# EAGLE board Pcb (EAGLE 6.6.0)
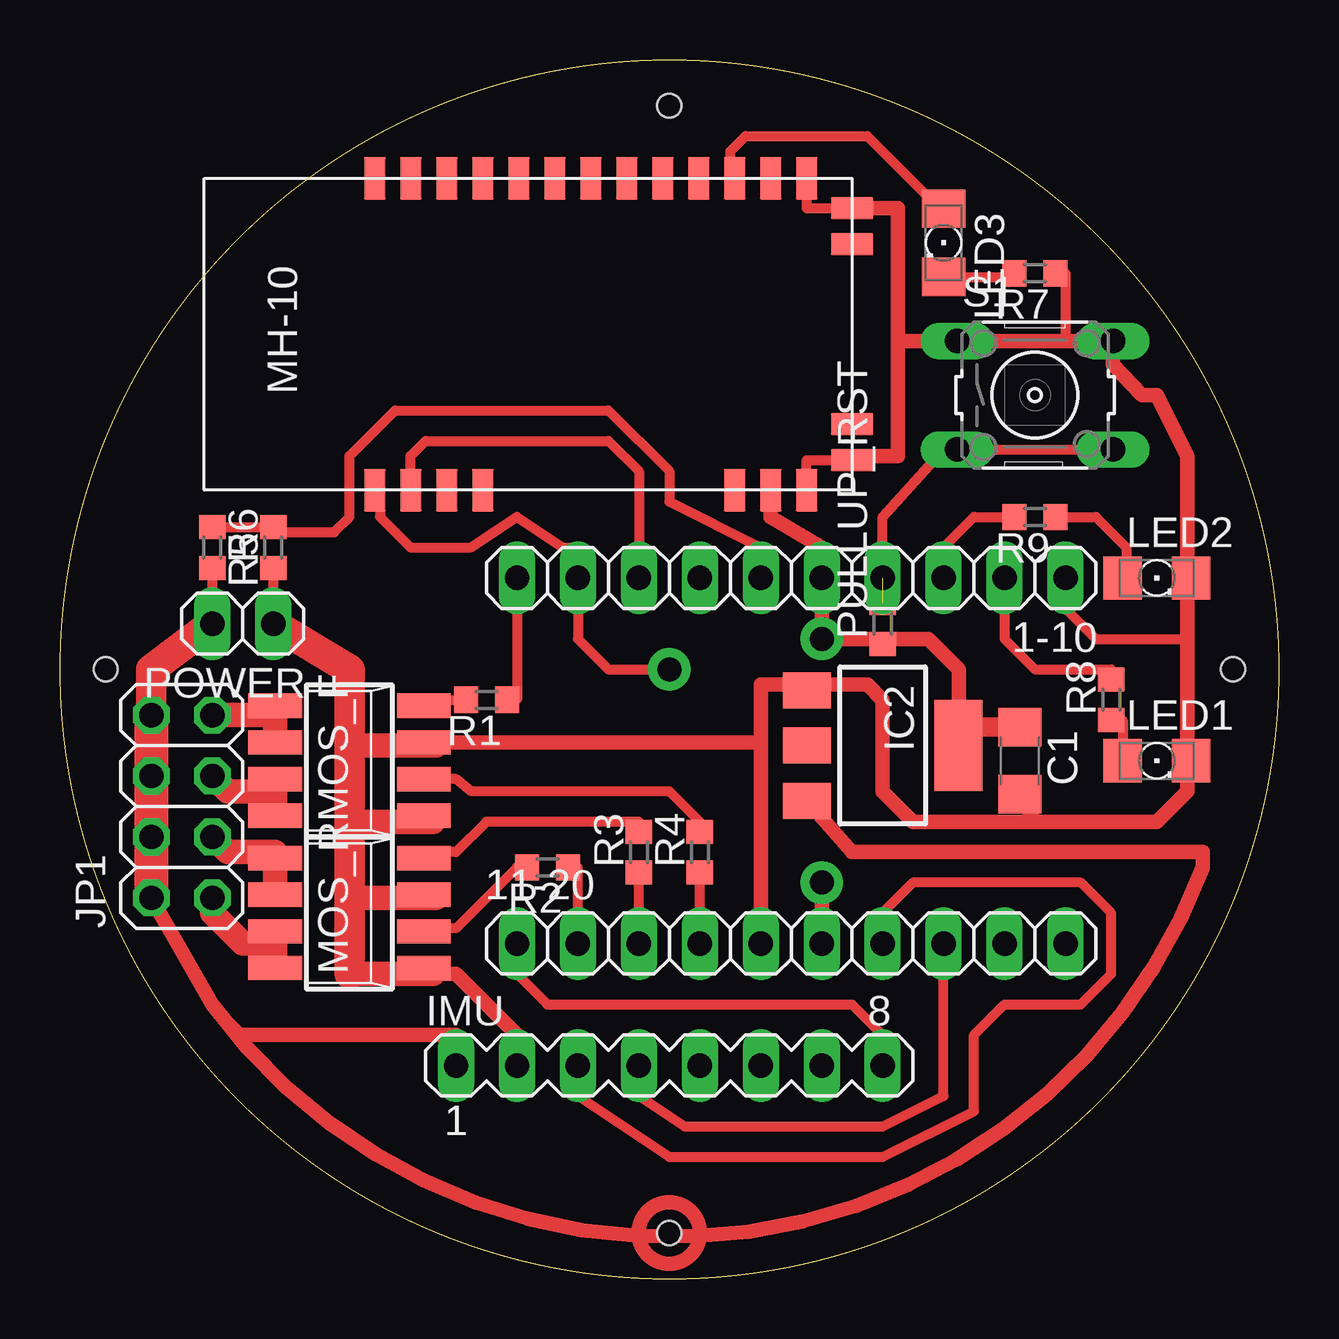
[diagram p0: board, top side]
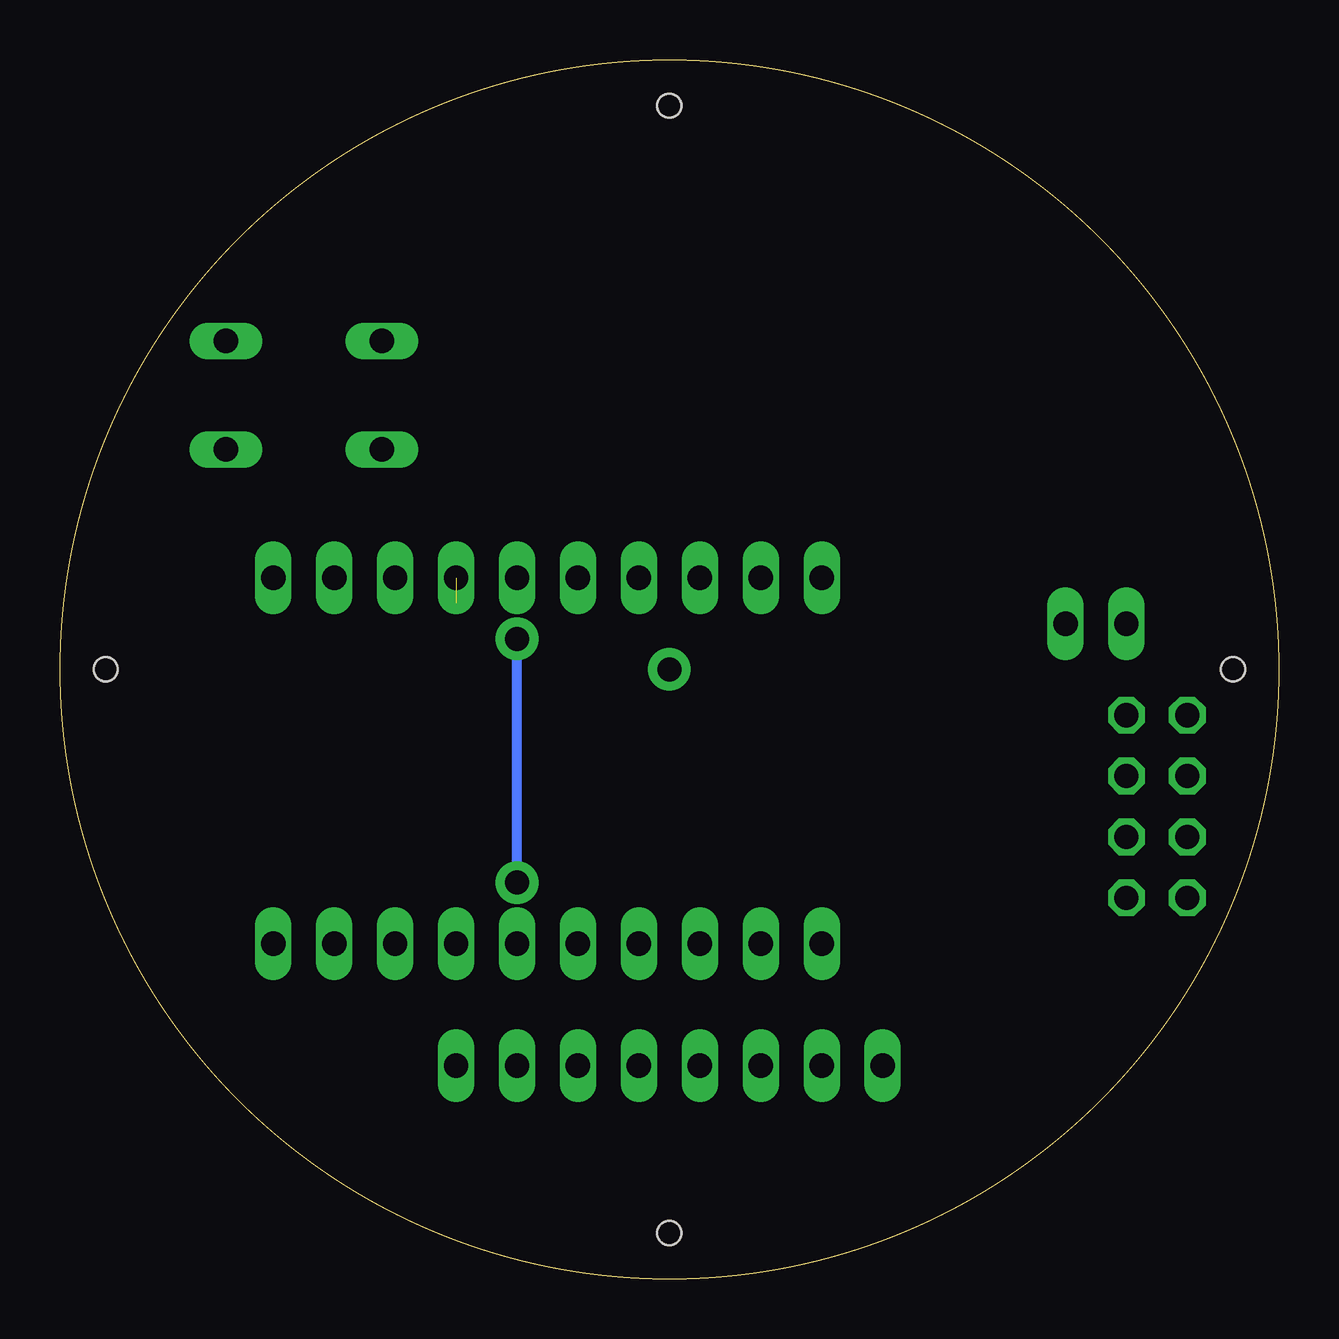
[diagram p1: board, bottom side, seen from below]

Size 50.8 x 50.8 mm. Coordinates in mm from the lower left corner, seen from the top.
Outline: circle at 25.4,25.4 radius 25.4
Copper layers (1*16): Top 0.035mm / dielectric 1.5mm / Bottom 0.035mm
Design rules "default": minimum track width 10mil, minimum drill 24mil, track to track 8mil, track to pad 8mil, pad to pad 8mil, via to via 8mil, smd to smd 8mil, copper to edge 40mil, drill to drill 8mil, minimum pad ring 10mil, minimum via ring 8mil, stop-mask expansion 4mil, vias tented up to drill 0mil, thermal gap 10mil
Holes 1 mm at 48.89,25.4 25.4,48.89 25.4,1.9 1.9,25.4

## Footprints (pad centres in the part's own frame; a part is rotated, then mirrored left to right if it is on the bottom)
1X10 = drill 1.016 long: 1 -11.43,0; 2 -8.89,0; 3 -6.35,0; 4 -3.81,0; 5 -1.27,0; 6 1.27,0; 7 3.81,0; 8 6.35,0; 9 8.89,0; 10 11.43,0
C1206 = smd 1.6 x 1.8: 1 -1.4,0; 2 1.4,0
SOT223 = smd 1.5 x 2: 1 -2.3,-3.15; 2 0,-3.15; 3 2.3,-3.15 | smd 3.8 x 2: 4 0,3.15
MA08-1 = drill 1.016 long: 1 -8.89,0; 2 -6.35,0; 3 -3.81,0; 4 -1.27,0; 5 1.27,0; 6 3.81,0; 7 6.35,0; 8 8.89,0
2X04 = drill 1.016 octagon: 1 -3.81,-1.27; 2 -3.81,1.27; 3 -1.27,-1.27; 4 -1.27,1.27; 5 1.27,-1.27; 6 1.27,1.27; 7 3.81,-1.27; 8 3.81,1.27
1206 = smd 1.6 x 1.803: A -1.422,0; C 1.422,0
SM8 = smd 1.016 x 2.235: 1 -2.286,-3.099; 2 -0.762,-3.099; 3 0.762,-3.099; 4 2.286,-3.099; 5 2.286,3.099; 6 0.762,3.099; 7 -0.762,3.099; 8 -2.286,3.099
1X02 = drill 1.016 long: 1 -1.27,0; 2 1.27,0
R0603 = smd 1 x 1.1: 1 -0.85,0; 2 0.85,0
B3F-10XX = drill 1.016 long: 1 -3.251,2.261; 2 3.251,2.261; 3 -3.251,-2.261; 4 3.251,-2.261
HM-10 = smd 1.778 x 0.914: 3V3 -6.5,3.4; GND -6.5,1.9; GND4 6.5,1.9; PIO0 6.5,3.4; PIO1 6.5,4.9; PIO2 6.5,6.4; PIO3 6.5,7.9; PIO4 6.5,9.4; PIO5 6.5,10.9; PIO6 6.5,12.4; PIO7 6.5,13.9; PIO8 6.5,15.4; PIO9 6.5,16.9; PIO10 6.5,18.4; PIO11 6.5,19.9; RESETB -6.5,4.9; UART_CTS -6.5,16.9; UART_RTS -6.5,15.4; UART_RX -6.5,18.4; UART_TX -6.5,19.9 | smd 0.914 x 1.778: GND2 -5.25,0; GND3 5.25,0; USB_D+ 3.75,0; USB_D- -3.75,0

## Placement (x,y rotation side)
1-10  [1X10]  30.48,29.21 180 top
11-20  [1X10]  30.48,13.97 0 top
C1  [C1206]  40,21.59 270 top
IC2  LD117AS33TR  [SOT223]  34.29,22.22 270 top
IMU  [MA08-1]  25.4,8.89 0 top
JP1  [2X04]  5.08,19.68 90 top
LED1  [1206]  45.72,21.59 0 top
LED2  [1206]  45.72,29.21 0 top
LED3  [1206]  36.83,43.18 270 top
MOS_F  [SM8]  12.06,21.59 90 top
MOS_R  [SM8]  12.06,15.24 90 top
POWER  [1X02]  7.62,27.3 180 top
PULLUP_RST  [R0603]  34.29,27.3 90 top
R1  [R0603]  17.78,24.13 180 top
R2  [R0603]  20.32,17.14 180 top
R3  [R0603]  24.13,17.78 90 top
R4  [R0603]  26.67,17.78 90 top
R5  [R0603]  6.35,30.48 270 top
R6  [R0603]  8.89,30.48 90 top
R7  [R0603]  40.64,41.91 180 top
R8  [R0603]  43.81,24.13 90 top
R9  [R0603]  40.64,31.75 180 top
S1  [B3F-10XX]  40.64,36.83 0 top
U$1  HM-10  [HM-10]  33.02,39.37 90 top

## Library data of the parts
1-10 11-20 JP1 POWER = pinhead
C1 = resistor
IC2 = v-reg
IMU = con-lstb; OC_FARNELL: unknown; OC_NEWARK: unknown
LED1-LED3 = led
MOS_F MOS_R = zetex; OC_FARNELL: unknown; OC_NEWARK: unknown
PULLUP_RST R1-R9 = rcl
S1 = switch-omron; MPN: B3F-1000; OC_FARNELL: 176432; OC_NEWARK: 36M3542
U$1 = Kao_lbr

## Nets
GND: 1-10.1 11-20.5 C1.2 IC2.1 IMU.2 LED1.C LED2.C MOS_F.1 MOS_F.3 MOS_R.1 MOS_R.3 POWER.1 R6.1 R7.1 S1.1 S1.2 U$1.GND U$1.GND2 U$1.GND3 U$1.GND4
N$1: JP1.7 MOS_F.5 MOS_F.6
N$2: JP1.5 MOS_F.7 MOS_F.8
N$3: JP1.3 MOS_R.5 MOS_R.6
N$4: JP1.1 MOS_R.7 MOS_R.8
N$5: 1-10.5 11-20.6 C1.1 IC2.4 PULLUP_RST.1 U$1.3V3
N$6: MOS_F.4 R1.2
N$7: MOS_F.2 R4.2
N$8: MOS_R.4 R3.2
N$9: MOS_R.2 R2.2
N$10: 1-10.10 R1.1
N$11: 11-20.2 R2.1
N$12: 11-20.3 R3.1
N$13: 11-20.4 R4.1
N$14: 1-10.6 R5.1 R6.2
N$15: 1-10.4 PULLUP_RST.2 S1.3 S1.4
N$16: 11-20.7 IMU.3
N$17: 11-20.8 IMU.4
N$18: LED1.A R8.1
N$19: 1-10.9 U$1.UART_TX
N$20: 1-10.8 U$1.UART_RX
N$21: 11-20.1 IMU.8
N$22: LED3.A U$1.PIO1
N$23: 1-10.2 R8.2
N$24: 1-10.3 R9.2
N$25: LED3.C R7.2
N$26: LED2.A R9.1
VCC: IC2.3 IMU.1 JP1.2 JP1.4 JP1.6 JP1.8 POWER.2 R5.2

## Tracks (layer width: path | path; a pad name or v marks a point on that pad's centre or on a via)
GND
  Top 0.406: R6.1 POWER.1 | U$1.GND4 31.12,44.62 U$1.GND3 | U$1.GND 31.12,34.12 U$1.GND2 33.02,34.29 | 46.99,29.21 LED2.C | 1-10.1 41.91,27.94 43.18,26.67 46.99,26.67 | 46.99,21.59 LED1.C | R7.1 41.91,41.91 41.91,39.09 | IC2.1 30.88,24.52 30.48,24.76 32.17,24.76 IC2.1
  Top 0.61: 15.54,12.7 16.51,12.7 19.05,10.16 IMU.2 | 33.02,34.29 34.92,34.29 34.92,39.09 | 34.92,39.09 S1.1 41.91,39.09 S1.2 43.89,38.1 45.08,36.83 45.72,36.83 46.99,34.29 46.99,29.21 46.99,26.67 46.99,21.59 46.99,20.32 45.72,19.05 40.64,19.05 | U$1.GND3 34.92,44.62 34.92,39.09 | 29.21,22.35 MOS_F.3 | 11-20.5 29.21,22.35 | 32.17,24.76 33.66,24.76 34.29,24.13 34.29,20.32 35.56,19.05 40.64,19.05 | 29.21,22.35 29.21,24.76 30.48,24.76 | C1.2 40.64,19.05
  Top 1.016: MOS_F.3 15.67,22.22 12.06,22.22 | MOS_F.1 15.54,19.05 12.06,19.05 | MOS_R.1 15.54,12.7 12.06,12.7 | MOS_R.3 15.67,15.87 12.06,15.87
  Top 1.27: POWER.1 12.06,25.4 12.06,22.22 12.06,19.05 12.06,15.87 12.06,12.7
N$1
  Top 1.016: JP1.7 8.97,23.49 MOS_F.5 MOS_F.6
N$2
  Top 1.016: JP1.5 6.98,20.32 8.97,20.32 MOS_F.7 MOS_F.8
N$3
  Top 1.016: JP1.3 6.98,17.78 8.97,17.78 MOS_R.5 MOS_R.6
N$4
  Top 1.016: JP1.1 6.35,15.24 7.62,13.97 8.97,13.97 | MOS_R.7 8.97,13.97 | 8.97,13.97 MOS_R.8
N$5  (via drill 1 pad 1.78)
  Top 0.406: 37.46,22.86 37.44,22.83 IC2.4 | 34.08,26.67 PULLUP_RST.1
  Top 0.61: U$1.3V3 29.62,31.75 31.75,30.48 1-10.5 v31.75,26.67 34.08,26.67 36.2,26.67 37.46,25.4 37.46,22.99 37.46,22.86 | 11-20.6 v31.75,16.51
  Top 0.813: C1.1 37.46,22.99
  Bottom 0.406: v31.75,16.51 v31.75,26.67
N$6
  Top 0.406: MOS_F.4 15.8,24.13 R1.2
N$7
  Top 0.406: R4.2 26.67,19.05 25.4,20.32 17.14,20.32 16.51,20.83 MOS_F.2
N$8
  Top 0.406: R3.2 24.13,19.05 17.78,19.05 16.51,17.78 14.78,17.78 MOS_R.4
N$9
  Top 0.406: R2.2 19.05,17.14 16.51,14.6 15.93,14.6 MOS_R.2
N$10
  Top 0.406: 1-10.10 19.05,24.13 R1.1
N$11
  Top 0.406: 11-20.2 21.59,17.14 R2.1
N$12
  Top 0.406: 11-20.3 R3.1
N$13
  Top 0.406: 11-20.4 R4.1
N$14
  Top 0.406: R5.1 R6.2 8.89,31.11 11.43,31.11 12.06,31.75 12.06,34.29 13.97,36.2 22.86,36.2 25.4,33.66 25.4,32.38 29.21,30.48 1-10.6
N$15  (1 unrouted)
  Top 0.406: 1-10.4 34.29,31.75 36.83,34.57 S1.3 S1.4
N$16
  Top 0.406: IMU.3 21.59,7.62 25.4,5.08 34.29,5.08 38.1,6.98 38.1,10.16 39.37,11.43 42.55,11.43 43.81,12.7 43.81,15.24 42.55,16.51 35.56,16.51 34.29,15.24 11-20.7
N$17
  Top 0.406: IMU.4 24.13,7.62 26.04,6.35 34.29,6.35 36.83,7.62 11-20.8
N$18
  Top 0.406: R8.1 44.3,23.28 LED1.A
N$19
  Top 0.406: U$1.UART_TX 13.33,32.66 13.33,31.75 14.6,30.48 17.14,30.48 19.05,31.75 20.95,30.48 21.59,30.48 1-10.9
N$20
  Top 0.406: U$1.UART_RX 14.6,32.85 14.6,34.29 15.24,34.92 22.86,34.92 24.13,33.66 1-10.8
N$21
  Top 0.406: 11-20.1 19.05,12.7 20.32,11.43 33.02,11.43 34.29,10.16 IMU.8
N$22
  Top 0.406: U$1.PIO1 27.94,45.87 27.94,46.99 28.57,47.62 33.66,47.62 36.83,44.45 LED3.A
N$23
  Top 0.406: 1-10.2 39.37,26.67 40.64,25.4 43.81,25.4 R8.2
N$24
  Top 0.406: 1-10.3 36.83,30.48 38.1,31.75 R9.2
N$25
  Top 0.406: LED3.C 39.79,41.76 R7.2
N$26
  Top 0.406: R9.1 43.18,31.75 44.45,30.48 44.45,29.21 LED2.A
N$27  (via drill 1 pad 1.78)
  Top 0.406: 21.59,27.94 21.59,26.67 22.86,25.4 v25.4,25.4
VCC
  Top 0.406: R5.2 POWER.2 | 7.62,10.16 6.35,11.43
  Top 0.61: IC2.3 33.02,17.78 47.62,17.78 47.62,17.14 arc-123 6.35,11.43 JP1.2 | IMU.1 16.51,10.16 7.62,10.16
  Top 1.27: POWER.2 3.81,25.4 JP1.8
  Top 1.422: JP1.8 JP1.6 JP1.4 JP1.2
(copper drawn outside any net)
  shapes: Top circle x1